# EAGLE board RGBAmp_5x5 (EAGLE 6.6.0)
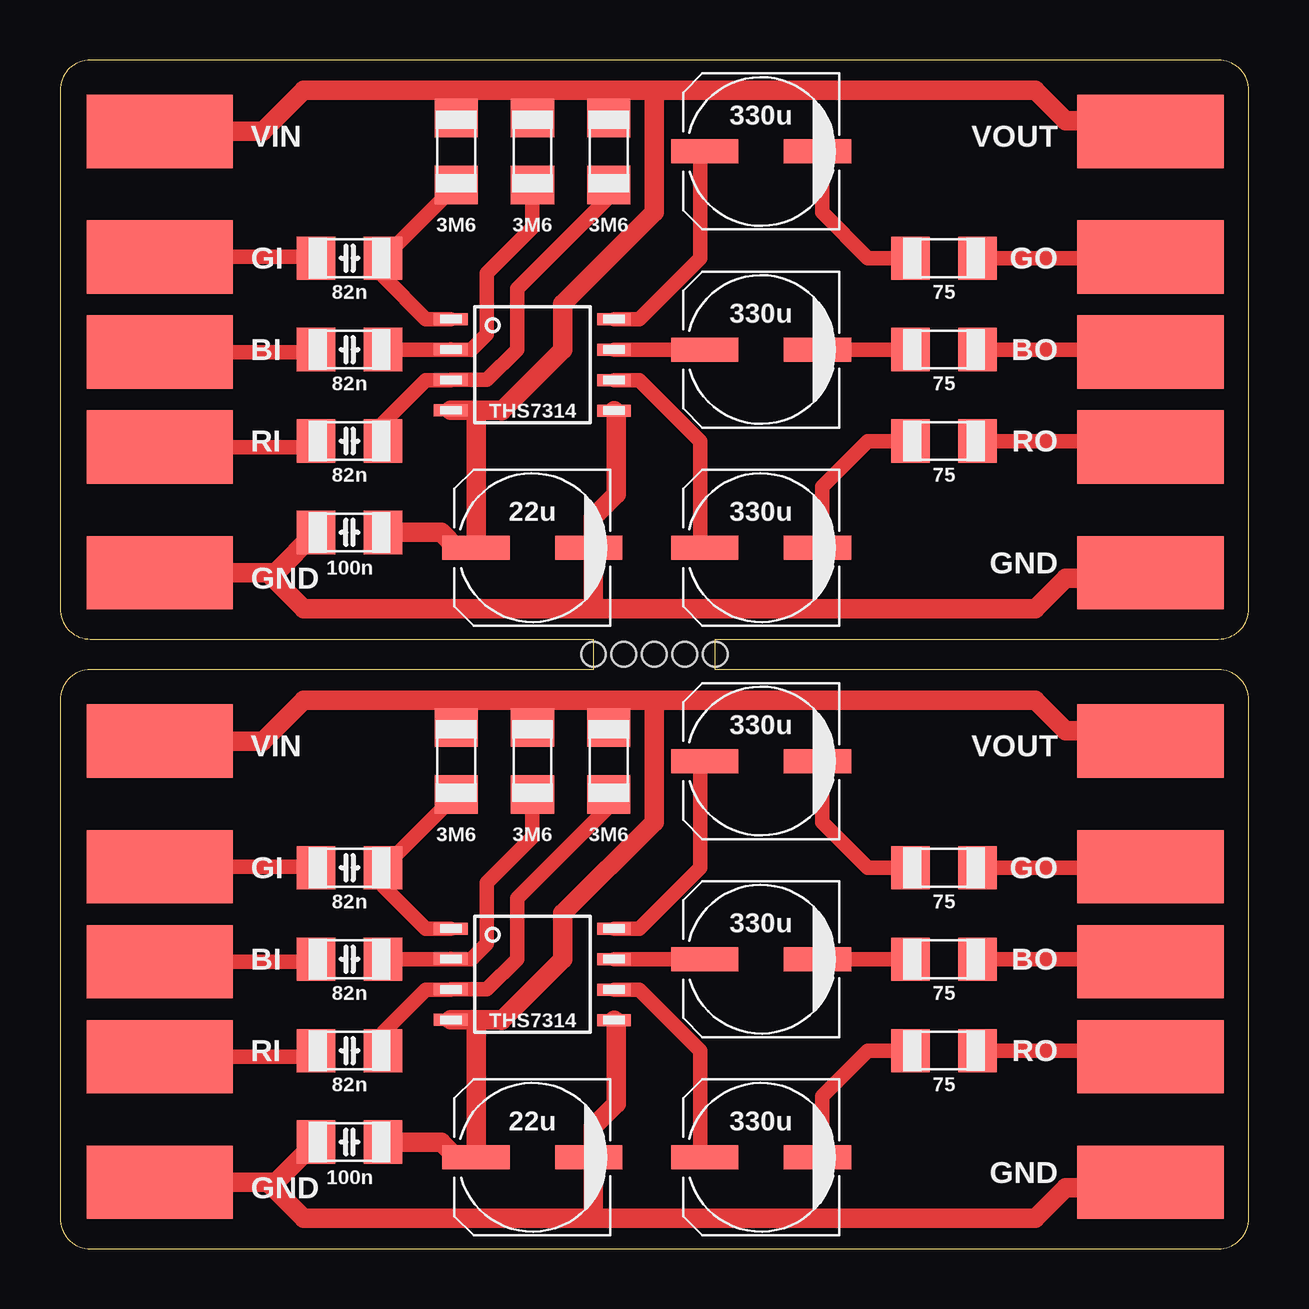
[diagram p0: board, top side]
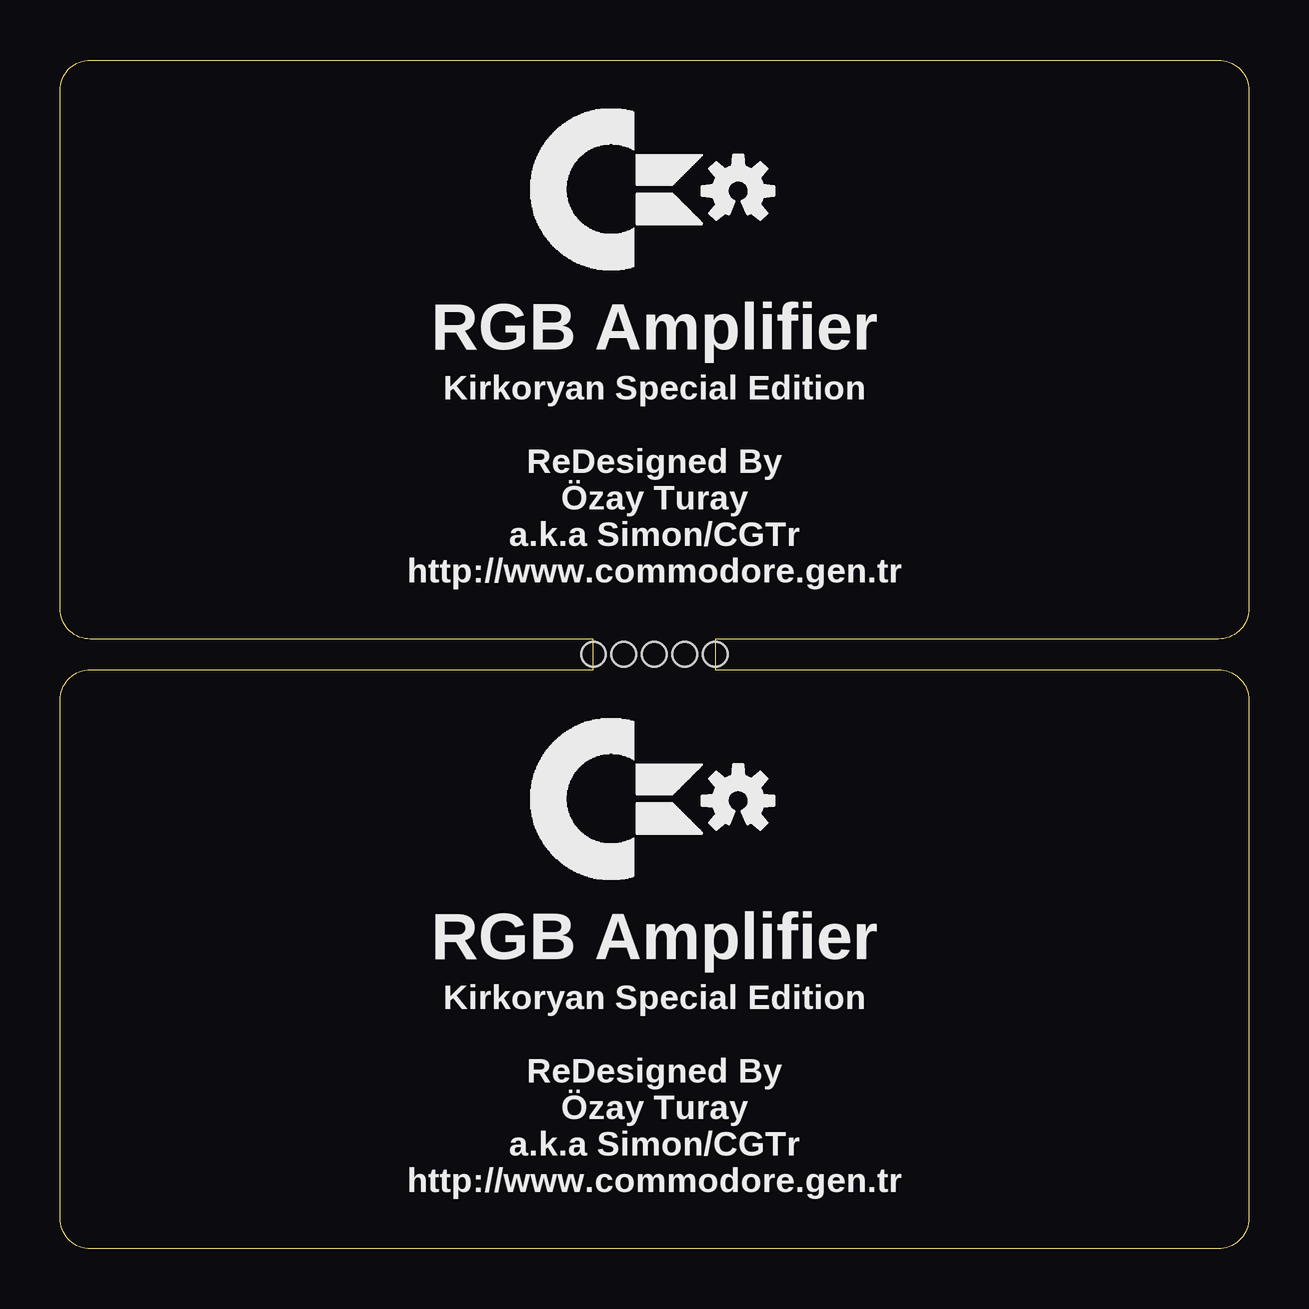
[diagram p1: board, bottom side, seen from below]

Size 49.53 x 49.53 mm. Coordinates in mm from the lower left corner, seen from the top.
Outline: 22.23,24.13 1.27,24.13 arc90 0,22.86 0,1.27 arc90 1.27,0 48.26,0 arc90 49.53,1.27 49.53,22.86 arc90 48.26,24.13 27.3,24.13 27.3,25.4 48.26,25.4 arc90 49.53,26.67 49.53,48.26 arc90 48.26,49.53 1.27,49.53 arc90 0,48.26 0,26.67 arc90 1.27,25.4 22.23,25.4 22.23,24.13
Copper layers (1*16): Top 0.035mm / dielectric 1.6mm / Bottom 0.035mm
Design rules "Elecrow": minimum track width 6mil, minimum drill 12mil, track to track 6mil, track to pad 6mil, pad to pad 6mil, via to via 8mil, smd to smd 0mil, copper to edge 20mil, drill to drill 10mil, minimum pad ring 6mil, minimum via ring 6mil, stop-mask expansion 0mil, vias tented up to drill 100mil, thermal gap 10mil
Holes 1.02 mm at 22.23,24.77 23.5,24.77 24.77,24.77 26.04,24.77 27.3,24.77

## Footprints (pad centres in the part's own frame; a part is rotated, then mirrored left to right if it is on the bottom)
CAPACITOR_CERAMIC_1206 = smd 1.6 x 1.8: 1 -1.4,0; 2 1.4,0
CAPACITOR_POLARIZED_6.3X7.7 = smd 2.8 x 1: + 2.35,0; - -2.35,0
GBR_PADS = smd 3.048 x 6.096: B 0.102,-0.289; G -3.858,-0.289; GND 9.292,-0.289; R 4.062,-0.289; VCC -9.088,-0.289
SOP08 = smd 0.5 x 1.4: 1 -1.905,-3.404; 2 -0.645,-3.404; 3 0.625,-3.404; 4 1.895,-3.404; 5 1.905,3.404; 6 0.635,3.404; 7 -0.635,3.404; 8 -1.905,3.404
RESISTOR_1206 = smd 1.6 x 1.8: 1 -1.4,0; 2 1.4,0

## Placement (x,y rotation side)
C1  82n  [CAPACITOR_CERAMIC_1206]  12.06,15.88 0 top
C2  82n  [CAPACITOR_CERAMIC_1206]  12.06,12.06 0 top
C3  82n  [CAPACITOR_CERAMIC_1206]  12.06,8.26 0 top
C4  330u  [CAPACITOR_POLARIZED_6.3X7.7]  29.21,20.32 180 top
C5  330u  [CAPACITOR_POLARIZED_6.3X7.7]  29.21,12.06 180 top
C6  330u  [CAPACITOR_POLARIZED_6.3X7.7]  29.21,3.81 180 top
C7  100n  [CAPACITOR_CERAMIC_1206]  12.06,4.45 180 top
C8  22u  [CAPACITOR_POLARIZED_6.3X7.7]  19.68,3.81 180 top
C9  82n  [CAPACITOR_CERAMIC_1206]  12.06,41.27 0 top
C10  82n  [CAPACITOR_CERAMIC_1206]  12.06,37.47 0 top
C11  82n  [CAPACITOR_CERAMIC_1206]  12.06,33.66 0 top
C12  330u  [CAPACITOR_POLARIZED_6.3X7.7]  29.21,45.72 180 top
C13  330u  [CAPACITOR_POLARIZED_6.3X7.7]  29.21,37.47 180 top
C14  330u  [CAPACITOR_POLARIZED_6.3X7.7]  29.21,29.21 180 top
C15  100n  [CAPACITOR_CERAMIC_1206]  12.06,29.84 180 top
C16  22u  [CAPACITOR_POLARIZED_6.3X7.7]  19.68,29.21 180 top
CN1  INPUT  [GBR_PADS]  4.45,12.06 270 top
CN2  OUTPUT  [GBR_PADS]  45.72,12.06 270 top
CN3  INPUT  [GBR_PADS]  4.45,37.47 270 top
CN4  OUTPUT  [GBR_PADS]  45.72,37.47 270 top
LOGO1  OSHW_LOGO_SMALL  [OSHW_LOGO_SMALL]  21.27,18.67 0 bottom
LOGO2  OSHW_LOGO_SMALL  [OSHW_LOGO_SMALL]  21.27,44.07 0 bottom
MCU1  THS7314  [SOP08]  19.68,11.43 270 top
MCU2  THS7314  [SOP08]  19.68,36.83 270 top
R1  3M6  [RESISTOR_1206]  16.51,20.32 90 top
R2  3M6  [RESISTOR_1206]  19.68,20.32 90 top
R3  3M6  [RESISTOR_1206]  22.86,20.32 90 top
R4  75  [RESISTOR_1206]  36.83,15.88 0 top
R5  75  [RESISTOR_1206]  36.83,12.06 0 top
R6  75  [RESISTOR_1206]  36.83,8.26 0 top
R7  3M6  [RESISTOR_1206]  16.51,45.72 90 top
R8  3M6  [RESISTOR_1206]  19.68,45.72 90 top
R9  3M6  [RESISTOR_1206]  22.86,45.72 90 top
R10  75  [RESISTOR_1206]  36.83,41.27 0 top
R11  75  [RESISTOR_1206]  36.83,37.47 0 top
R12  75  [RESISTOR_1206]  36.83,33.66 0 top

## Library data of the parts
C1-C16 LOGO1 LOGO2 R1-R12 = sj_standart
CN1-CN4 = sj_connectors
MCU1 MCU2 = sj_ic

## Nets
GND: C7.2 C8.- CN1.GND CN2.GND MCU1.5
GND1: C15.2 C16.- CN3.GND CN4.GND MCU2.5
N$1: C1.2 MCU1.1 R1.1
N$2: C2.2 MCU1.2 R2.1
N$3: C3.2 MCU1.3 R3.1
N$4: C2.1 CN1.B
N$5: C1.1 CN1.G
N$6: C3.1 CN1.R
N$7: C4.+ MCU1.8
N$8: C5.+ MCU1.7
N$9: C6.+ MCU1.6
N$10: C4.- R4.1
N$11: C5.- R5.1
N$12: C6.- R6.1
N$13: CN2.G R4.2
N$14: CN2.B R5.2
N$15: CN2.R R6.2
N$16: C9.2 MCU2.1 R7.1
N$17: C10.2 MCU2.2 R8.1
N$18: C11.2 MCU2.3 R9.1
N$19: C10.1 CN3.B
N$20: C9.1 CN3.G
N$21: C11.1 CN3.R
N$22: C12.+ MCU2.8
N$23: C13.+ MCU2.7
N$24: C14.+ MCU2.6
N$25: C12.- R10.1
N$26: C13.- R11.1
N$27: C14.- R12.1
N$28: CN4.G R10.2
N$29: CN4.B R11.2
N$30: CN4.R R12.2
VCC: C7.1 C8.+ CN1.VCC CN2.VCC MCU1.4 R1.2 R2.2 R3.2
VCC1: C15.1 C16.+ CN3.VCC CN4.VCC MCU2.4 R7.2 R8.2 R9.2

## Tracks (layer width: path | path; a pad name or v marks a point on that pad's centre or on a via)
GND
  Top 0.813: CN1.GND 8.66,2.77 | 8.66,2.77 10.16,1.27 22.23,1.27 | 22.23,1.27 40.64,1.27 41.91,2.54 45.83,2.54 CN2.GND | C8.- 22.23,3.81 | 22.23,3.81 22.23,1.27 | 8.66,2.77 8.99,2.77 C7.2 | 22.23,3.81 22.23,5.08 23.18,6.03 23.18,9.44 MCU1.5
GND1
  Top 0.813: CN3.GND 8.66,28.17 | 8.66,28.17 10.16,26.67 22.23,26.67 | 22.23,26.67 40.64,26.67 41.91,27.94 45.83,27.94 CN4.GND | C16.- 22.23,29.21 | 22.23,29.21 22.23,26.67 | 8.66,28.17 8.99,28.17 C15.2 | 22.23,29.21 22.23,30.48 23.18,31.43 23.18,34.84 MCU2.5
N$1
  Top 0.61: MCU1.1 15.24,13.34 13.46,15.11 C1.2 R1.1
N$2
  Top 0.61: C2.2 MCU1.2 16.29,12.06 17.14,12.06 17.78,12.7 17.78,15.24 19.68,17.14 R2.1
N$3
  Top 0.61: C3.2 13.46,9.02 15.24,10.79 MCU1.3 17.79,10.8 19.05,12.06 19.05,14.61 22.86,18.41 R3.1
N$4
  Top 0.61: CN1.B 10.56,11.96 C2.1
N$5
  Top 0.61: CN1.G 10.62,15.92 C1.1
N$6
  Top 0.61: CN1.R 10.41,8 C3.1
N$7
  Top 0.61: MCU1.8 24.13,13.34 26.67,15.88 26.67,20.13 C4.+
N$8
  Top 0.61: C5.+ MCU1.7
N$9
  Top 0.61: MCU1.6 24.13,10.79 26.67,8.26 26.67,4 C6.+
N$10
  Top 0.61: R4.1 33.66,15.88 31.75,17.78 31.75,20.13 C4.-
N$11
  Top 0.61: C5.- R5.1
N$12
  Top 0.61: R6.1 33.66,8.26 31.75,6.35 31.75,4 C6.-
N$13
  Top 0.61: R4.2 46.02,15.88 CN2.G
N$14
  Top 0.61: R5.2 45.96,12.06 CN2.B
N$15
  Top 0.61: R6.2 45.81,8.26 CN2.R
N$16
  Top 0.61: MCU2.1 15.24,38.73 13.46,40.51 C9.2 R7.1
N$17
  Top 0.61: C10.2 16.27,37.47 MCU2.2 16.29,37.47 17.14,37.47 17.78,38.1 17.78,40.64 19.68,42.55 R8.1
N$18
  Top 0.61: C11.2 13.46,34.42 15.24,36.2 MCU2.3 17.79,36.2 19.05,37.47 19.05,40.01 22.86,43.81 R9.1
N$19
  Top 0.61: CN3.B 10.56,37.36 C10.1
N$20
  Top 0.61: CN3.G 10.62,41.32 C9.1
N$21
  Top 0.61: CN3.R 10.41,33.4 C11.1
N$22
  Top 0.61: MCU2.8 24.13,38.73 26.67,41.27 26.67,45.53 C12.+
N$23
  Top 0.61: C13.+ MCU2.7
N$24
  Top 0.61: MCU2.6 24.13,36.2 26.67,33.66 26.67,29.4 C14.+
N$25
  Top 0.61: R10.1 33.66,41.27 31.75,43.18 31.75,45.53 C12.-
N$26
  Top 0.61: C13.- R11.1
N$27
  Top 0.61: R12.1 33.66,33.66 31.75,31.75 31.75,29.4 C14.-
N$28
  Top 0.61: R10.2 46.02,41.27 CN4.G
N$29
  Top 0.61: R11.2 45.96,37.47 CN4.B
N$30
  Top 0.61: R12.2 45.81,33.66 CN4.R
VCC
  Top 0.406: CN2.VCC 45.72,21.15 45.72,21.59 | 16.51,3.81 C8.+
  Top 0.813: CN1.VCC 8.45,21.15 10.16,22.86 16.51,22.86 | 16.51,22.86 19.68,22.86 | 19.68,22.86 22.86,22.86 | 22.86,22.86 24.77,22.86 | 24.77,22.86 40.64,22.86 41.91,21.59 45.72,21.59 | MCU1.4 17.14,9.54 | 17.14,9.54 18.41,9.54 18.41,9.53 20.95,12.06 20.95,13.97 24.77,17.78 24.77,22.86 | R1.2 16.51,22.86 | R2.2 19.68,22.86 | R3.2 22.86,22.86 | C8.+ 17.34,9.35 17.14,9.54 | C7.1 15.88,4.45 16.51,3.81
VCC1
  Top 0.406: CN4.VCC 45.72,46.55 45.72,46.99 | 16.51,29.21 C16.+
  Top 0.813: CN3.VCC 8.45,46.55 10.16,48.26 16.51,48.26 | 16.51,48.26 19.68,48.26 | 19.68,48.26 22.86,48.26 | 22.86,48.26 24.77,48.26 | 24.77,48.26 40.64,48.26 41.91,46.99 45.72,46.99 | MCU2.4 17.14,34.94 | 17.14,34.94 18.41,34.94 18.41,34.92 20.95,37.47 20.95,39.37 24.77,43.18 24.77,48.26 | R7.2 16.51,48.26 | R8.2 19.68,48.26 | R9.2 22.86,48.26 | C16.+ 17.34,34.74 17.14,34.94 | C15.1 15.88,29.84 16.51,29.21

## Text on the board
tPlace: VIN | VOUT | GI | GO | BI | BO | RI | RO | GND | GND | VIN | VOUT | GI | GO | BI | BO | RI | RO | GND | GND
bPlace: RGB Amplifier | Kirkoryan Special Edition / / ReDesigned By / Özay Turay / a.k.a Simon/CGTr / http://www.commodore.gen.tr | RGB Amplifier | Kirkoryan Special Edition / / ReDesigned By / Özay Turay / a.k.a Simon/CGTr / http://www.commodore.gen.tr